# Altium PCB CMV.PcbDoc (part 1 of 2)
Units mm, origin at the board's own origin, x right, y up, seen from the top; angles counter-clockwise.
Board outline 97.43 x 161.7 mm, 4 copper layers (LVDS, GND, POWER, CMOS), stack 0.735 mm thick; 59 components, 58 nets, 1207 pads, 70 vias.
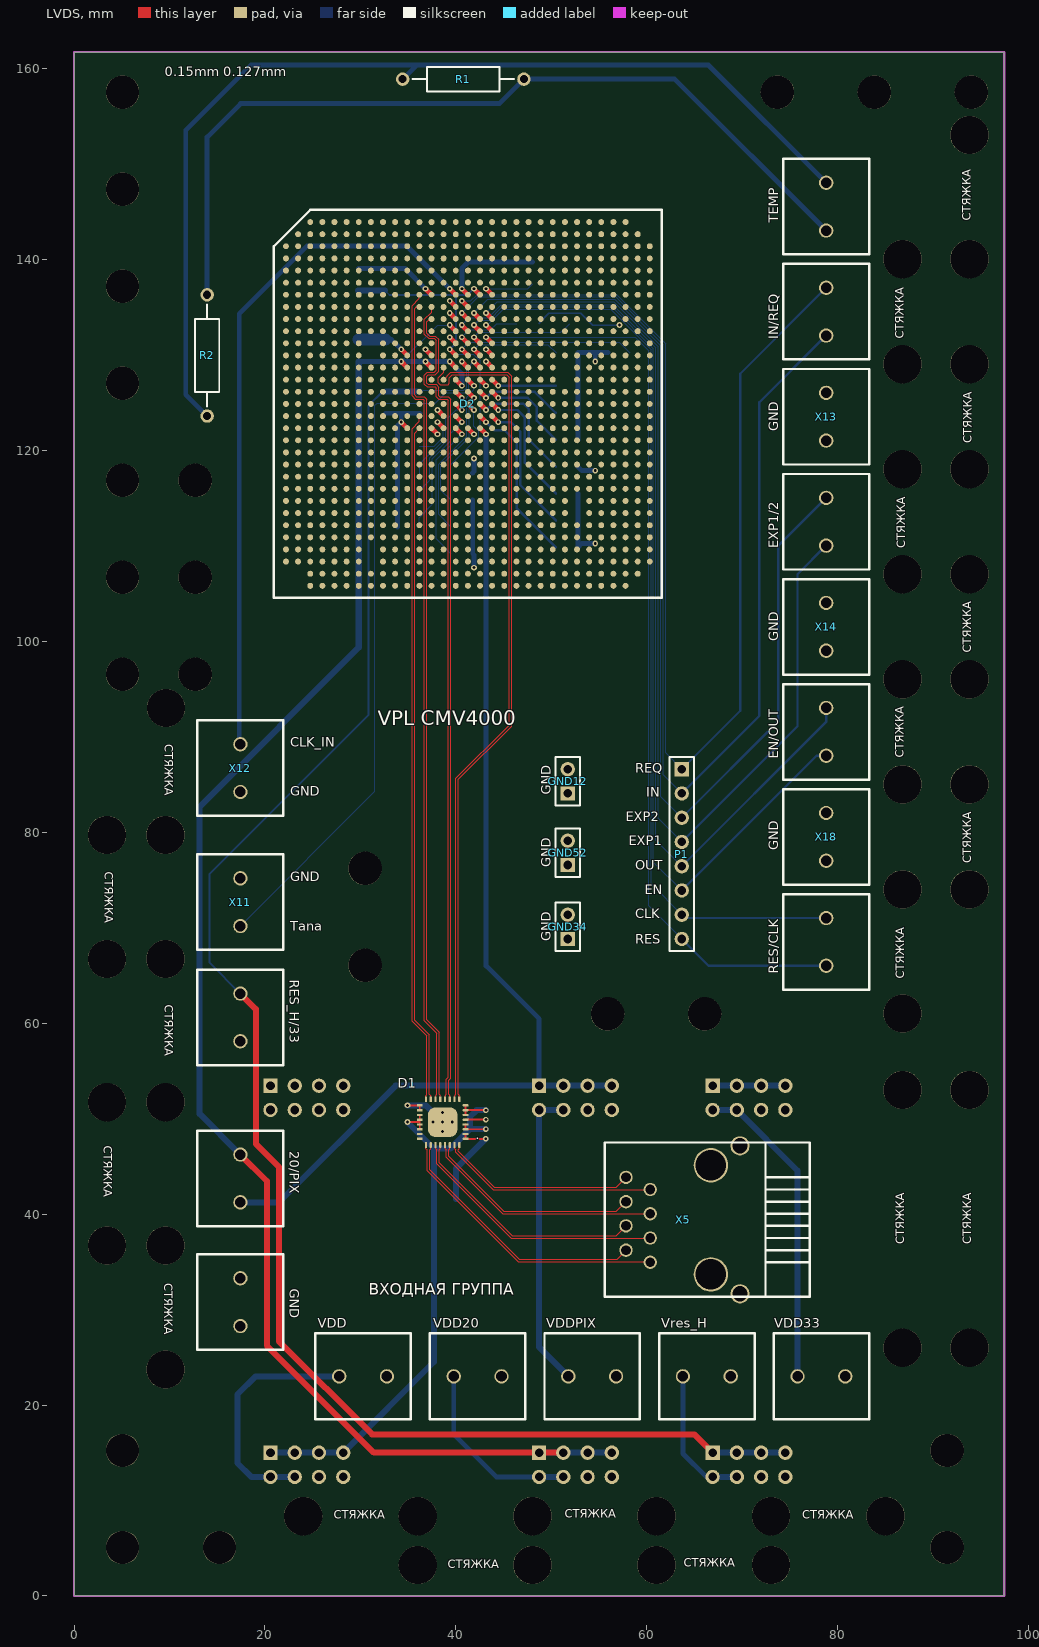
[diagram p0: LVDS view]
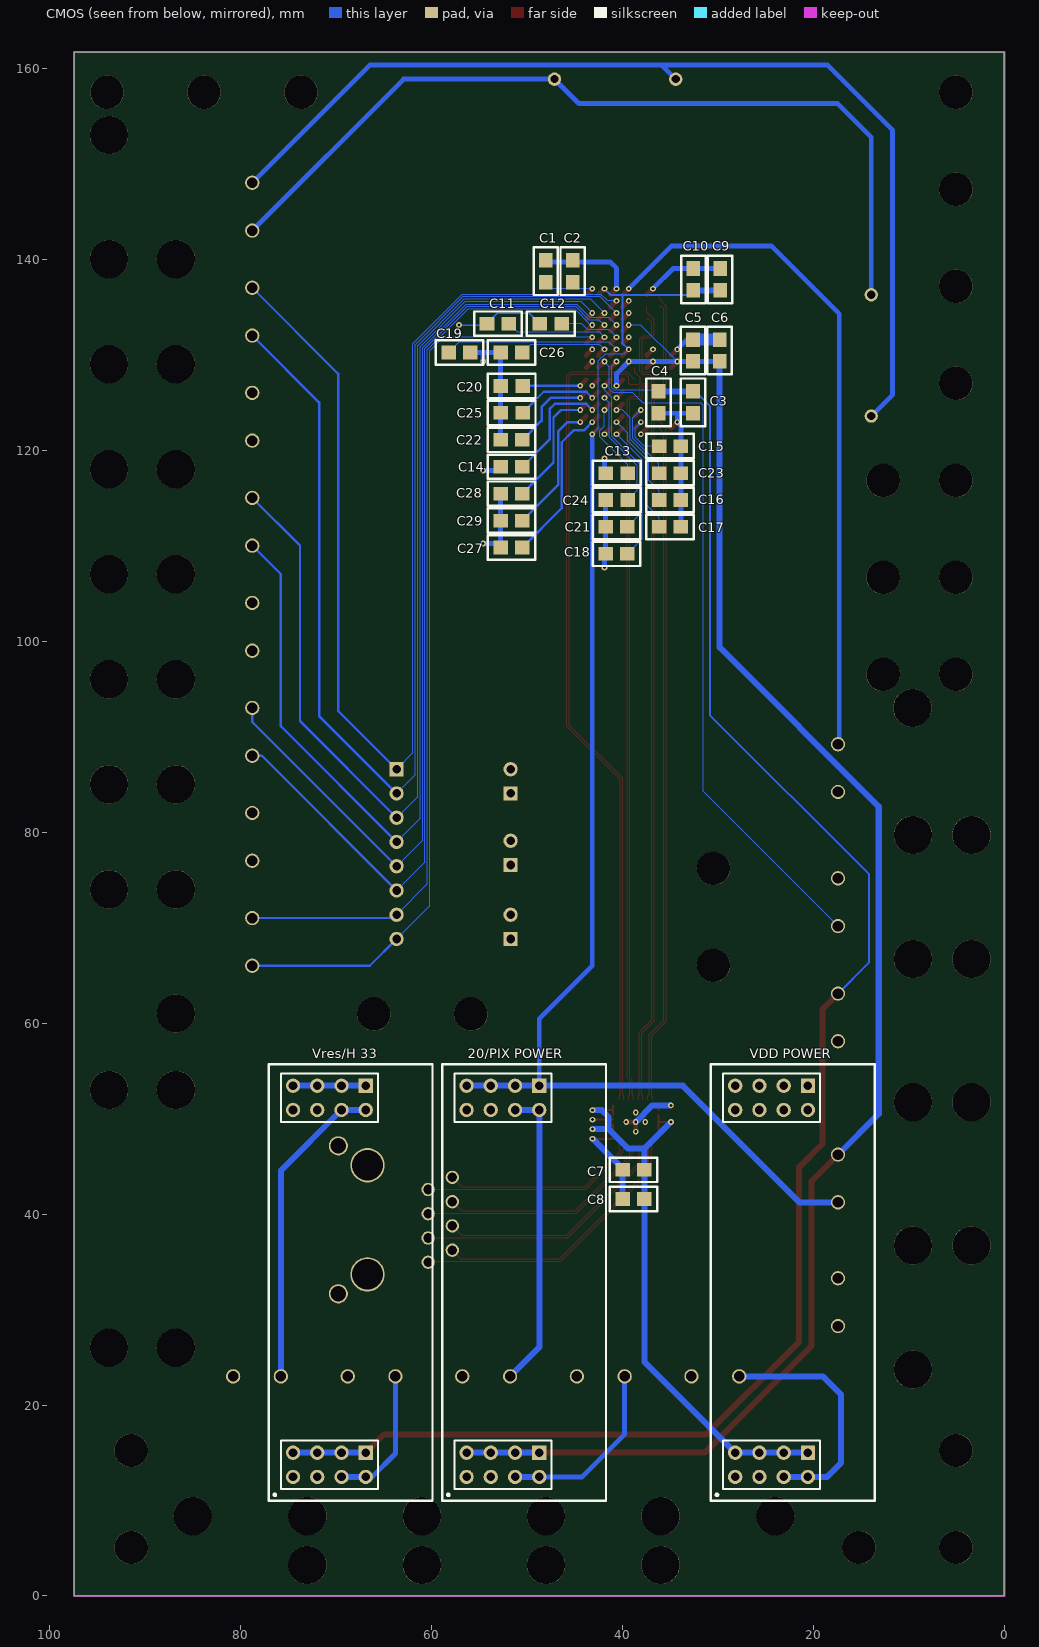
[diagram p1: CMOS view, seen from below]
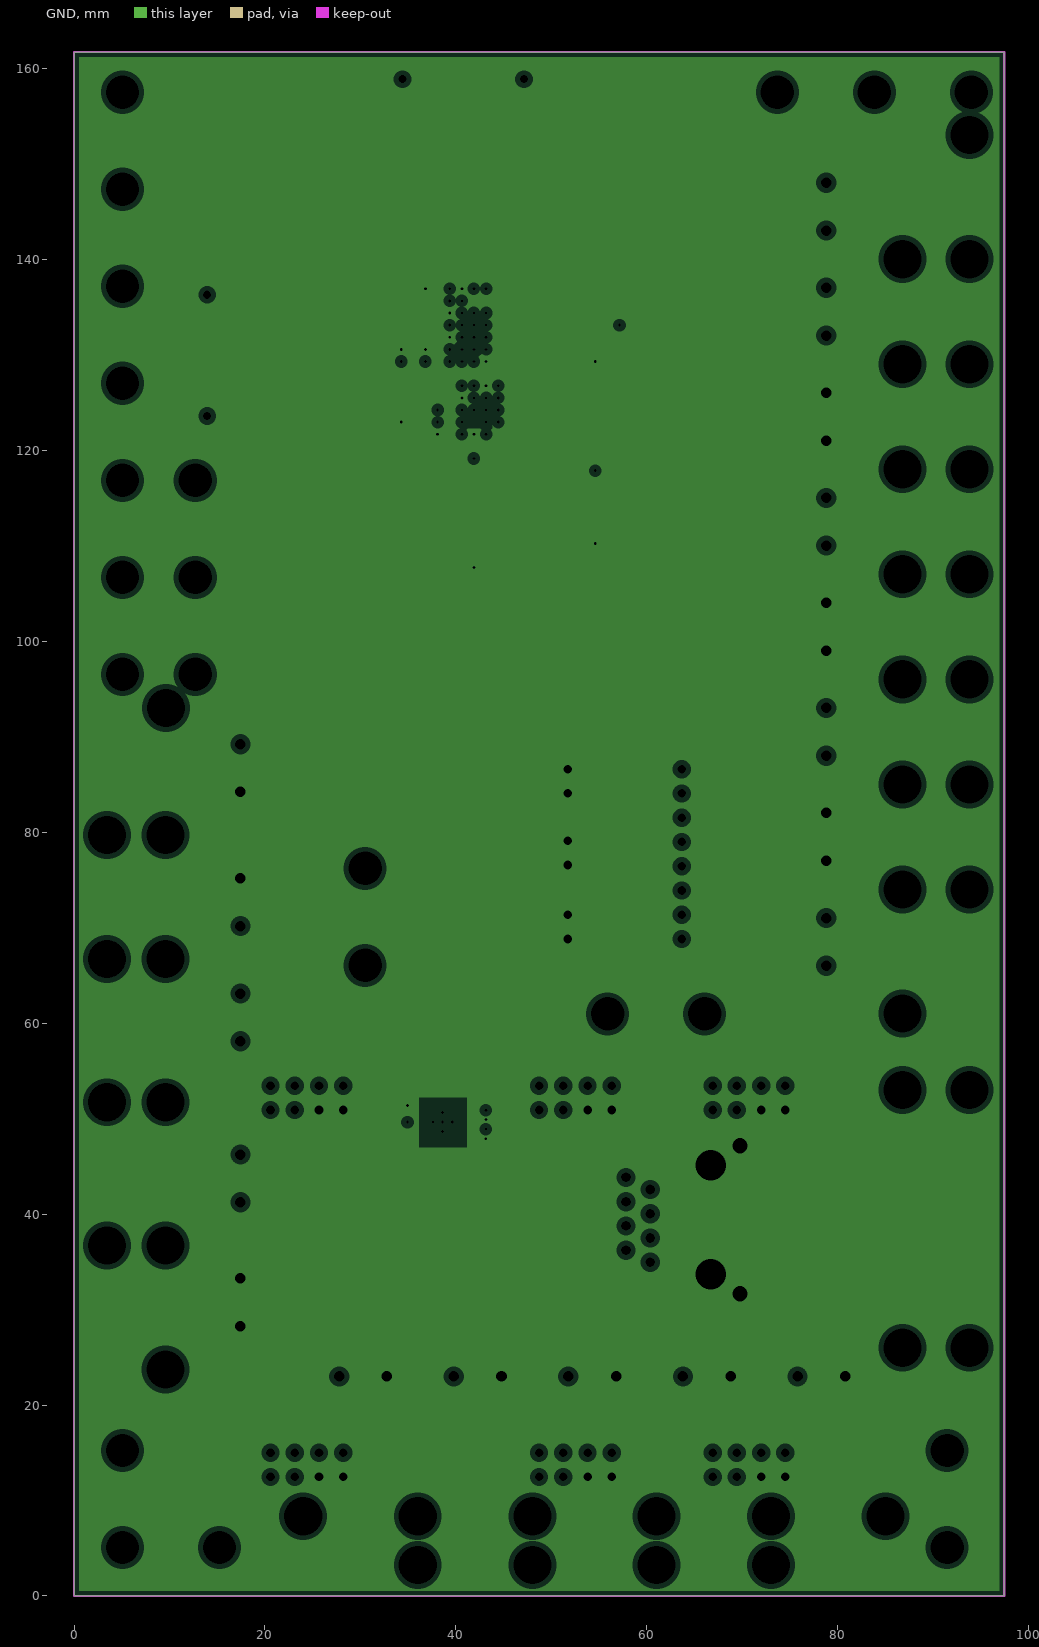
[diagram p2: GND, clearances drawn from the general rule]
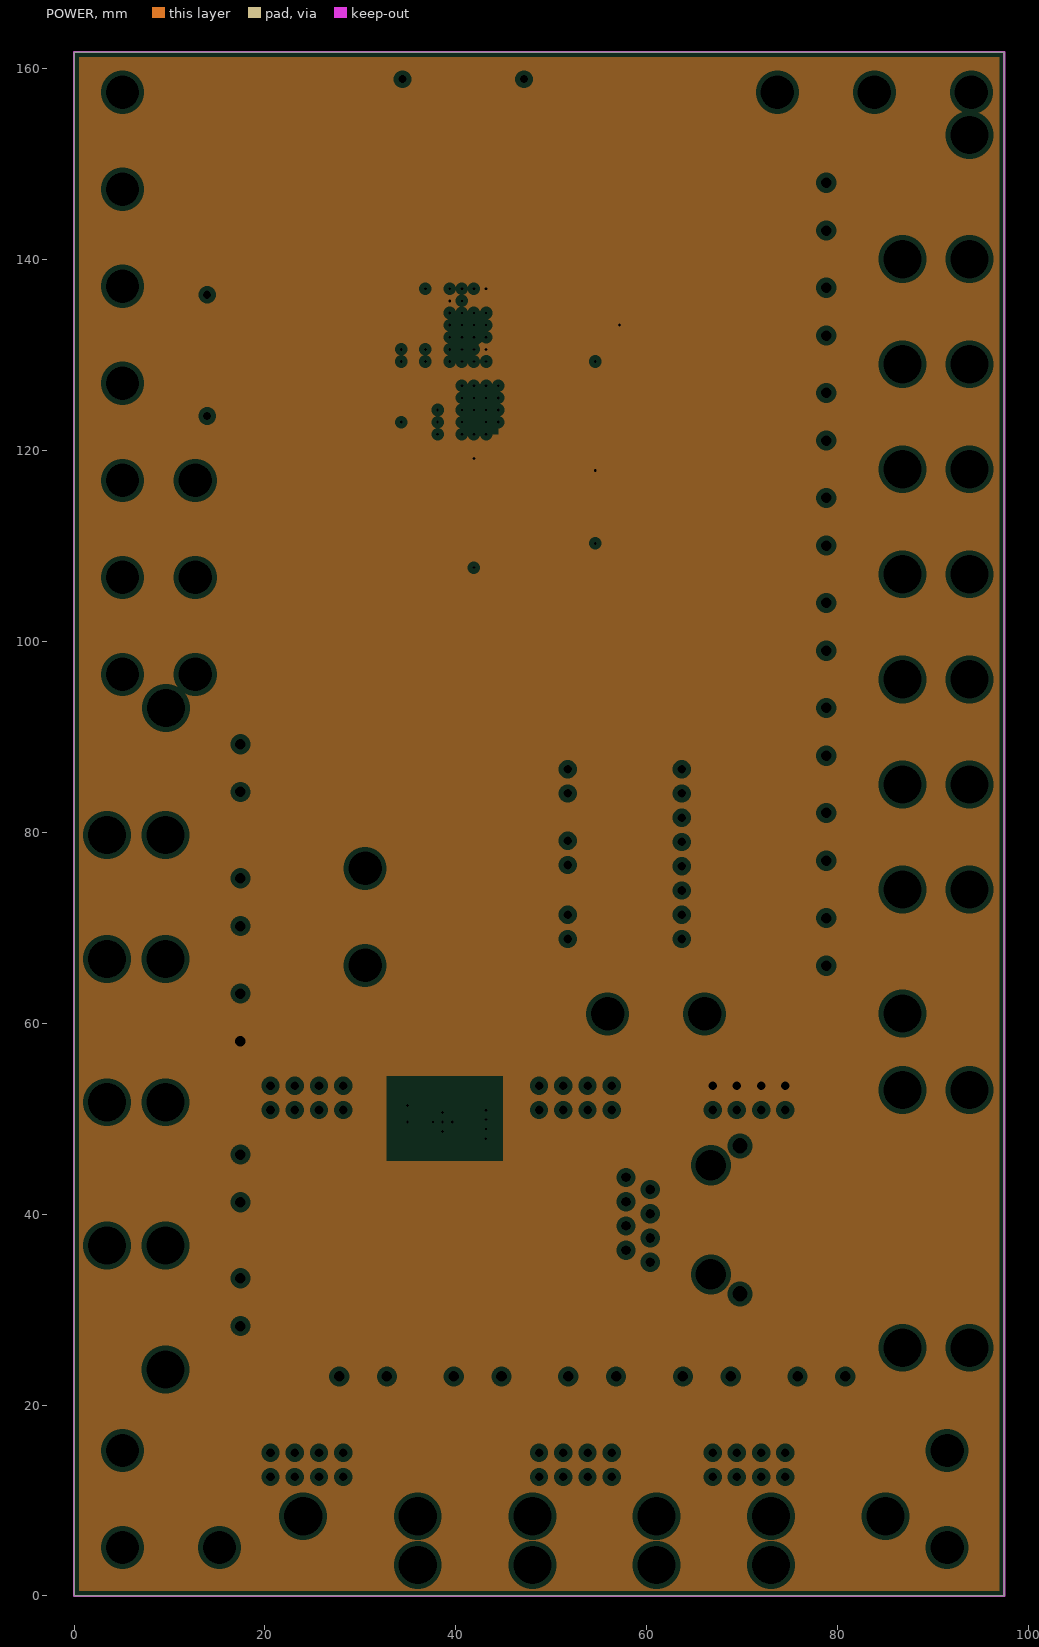
[diagram p3: POWER, clearances drawn from the general rule]

## Layer stack, top to bottom
Top Solder: solder mask 0.0102, Solder Resist, Dk 3.5
LVDS: signal copper 0.018
Dielectric 1: core 0.15, FR-4, Dk 4.6
GND: plane copper 0.018, net GND
Dielectric 2: core 0.15, FR-4, Dk 4.2
POWER: plane copper 0.254, net VDD33
Dielectric 3: prepreg 0.127, Dk 4.2
CMOS: signal copper 0.018
Bottom Solder: solder mask 0.0102, Solder Resist, Dk 3.5

## Board outline
0,0 97.434,0 97.434,161.695 0,161.695

## Design rules (kind name [scope] priority, off if disabled: settings)
Clearance [All] p1: gap=0.127
DiffPairsRouting [All] p1: maxlimit=0.254 minlimit=0.127 mostfreqgap=0.254 toplayer_maxgap=0.127 toplayer_prefgap=0.127 toplayer_minwidth=0.127 toplayer_maxwidth=0.127 toplayer_prefwidth=0.127 bottomlayer_mingap=0.254 bottomlayer_minwidth=0.381 bottomlayer_maxwidth=0.381 bottomlayer_prefwidth=0.381 maxuncoupledlength=12.7
HoleSize [All] p1: absolutevalues=TRUE maxlimit=20.54 minlimit=0.025 maxpercent=80.000 minpercent=20.000
MinimumSolderMaskSliver [All] p1: minsoldermaskwidth=0
PlaneClearance [All] p1: clearance=0.508
PlaneConnect [All] p1: planeconnectstyle=Relief reliefexpansion=0.508 reliefentries=4 reliefconductorwidth=0.254 reliefairgap=0.254
PolygonConnect [All] p1: connectstyle=Relief reliefconductorwidth=0.254 reliefentries=4 polygonreliefangle="90 Angle" airgapwidth=0.254
RoutingVias [All] p1: holewidth=0.3 width=0.6 viastyle="Through Hole" minholewidth=0.3 minwidth=0.6 maxholewidth=0.3 maxwidth=0.6
SolderMaskExpansion [All] p1: expansion=0.1
Width [All] p1: maxlimit=2.254 minlimit=0.125 preferedwidth=0.254 toplayer_prefwidth=0.127 bottomlayer_minwidth=0.127 minimp=50.000000 maximp=50.000000 favimp=50.000000
24 further rules are at their usual default settings.

## Classes and differential pairs
differential pair OUT1REP: +OUT1REP_P -OUT1REP_N
differential pair OUT1: +OUT1_P -OUT1_N
differential pair OUT9REP: +OUT9REP_P -OUT9REP_N
differential pair OUT9: +OUT9_P -OUT9_N
differential pair OUTCLKREP: +OUTCLKREP_P -OUTCLKREP_N
differential pair OUTCLK: +OUTCLK_P -OUTCLK_N
differential pair OUTCTRREP: +OUTCTRREP_P -OUTCTRREP_N
differential pair OUTCTR: +OUTCTR_P -OUTCTR_N

## Components (designator, comment, footprint, x,y, rotation, side; value= is the part's Value field where it differs from the comment)
20/PIX "KL_2" KLEMMNIK_2 17.424,46.227 r270 top (schematic designator X1)
"20/PIX POWER" "MEZ_POWER" MEZON_POWER_NEW 56.325,12.47 r90 bottom (schematic designator X4)
C1 "0,1" CAP_SMALL 49.301,141.248 r270 bottom
C2 "0,01" CAP_SMALL 46.482,141.248 r270 bottom
C3 "0,1" CAP_SMALL 31.344,122.503 r90 bottom
C4 "0,01" CAP_SMALL 34.95,122.503 r90 bottom
C5 "0,1" CAP_SMALL 33.884,132.943 r270 bottom
C6 "0,01" CAP_SMALL 31.09,132.943 r270 bottom
C7 "0,1" CAP_SMALL 41.351,43.357 r180 bottom
C8 "0,01" CAP_SMALL 41.351,40.309 r180 bottom
C9 "0,1" CAP_SMALL 31.039,140.385 r270 bottom
C10 "0,01" CAP_SMALL 33.833,140.385 r270 bottom
C11 "0,1" CAP_SMALL 55.55,131.977 r180 bottom
C12 "0,1" CAP_SMALL 50.013,131.977 r180 bottom
C13 "0,1" CAP_SMALL 43.104,116.331 r180 bottom
C14 "0,1" CAP_SMALL 54.127,116.991 r180 bottom
C15 "0,1" CAP_SMALL 32.512,121.69 r0 bottom
C16 "0,1" CAP_SMALL 32.512,116.052 r0 bottom
C17 "0,1" CAP_SMALL 32.512,113.232 r0 bottom
C18 "0,1" CAP_SMALL 43.129,107.873 r180 bottom
C19 "0,1" CAP_SMALL 54.559,131.495 r0 bottom
C20 "0,1" CAP_SMALL 54.102,125.45 r180 bottom
C21 "0,1" CAP_SMALL 43.129,110.692 r180 bottom
C22 "0,1" CAP_SMALL 54.127,119.811 r180 bottom
C23 "0,1" CAP_SMALL 32.512,118.871 r0 bottom
C24 "0,1" CAP_SMALL 43.104,113.512 r180 bottom
C25 "0,1" CAP_SMALL 54.102,122.63 r180 bottom
C26 "0,1" CAP_SMALL 54.127,128.955 r180 bottom
C27 "0,1" CAP_SMALL 54.127,108.533 r180 bottom
C28 "0,1" CAP_SMALL 54.127,114.172 r180 bottom
C29 "0,1" CAP_SMALL 54.127,111.353 r180 bottom
D1 "DS90LV804TSQ(REP)" DS90LV804TSQ 38.608,49.631 r180 top
D2 "CMV4000" SOCKET_AM2 23.47,142.62 r0 top
EN/OUT "KL_2" KLEMMNIK_2 78.77,88 r90 top (schematic designator X12)
EXP1/2 "KL_2" KLEMMNIK_2 78.77,110 r90 top (schematic designator X11)
GND "KL_2" KLEMMNIK_2 17.424,33.273 r270 top (schematic designator X3)
GND12 "GND" HDR1X2 51.714,84.048 r90 top (schematic designator P2)
GND34 "GND" HDR1X2 51.714,68.808 r90 top (schematic designator P4)
GND52 "GND" HDR1X2 51.714,76.555 r90 top (schematic designator P3)
IN/REQ "KL_2" KLEMMNIK_2 78.77,132 r90 top (schematic designator X14)
P1 "Header 8" HDR1X8 63.652,86.588 r270 top
R1 "Res Semi" AXIAL-0.5 40.767,158.851 r0 top
R2 "Res Semi" AXIAL-0.5 13.945,129.92 r90 top
RES/CLK "KL_2" KLEMMNIK_2 78.77,66 r90 top (schematic designator X13)
RES_H/33 "KL_2" KLEMMNIK_2 17.424,63.093 r270 top (schematic designator X2)
TEMP "KL_2" KLEMMNIK_2 78.77,148 r270 top (schematic designator X6)
VDD "KL_2" KLEMMNIK_2 27.77,23 r0 top (schematic designator X17)
VDD20 "KL_2" KLEMMNIK_2 39.77,23 r0 top (schematic designator X7)
VDD33 "KL_2" KLEMMNIK_2 75.77,23 r0 top (schematic designator X15)
"VDD POWER" "MEZ_POWER" MEZON_POWER_NEW 28.194,12.47 r90 bottom (schematic designator X16)
VDDPIX "KL_2" KLEMMNIK_2 51.77,23 r0 top (schematic designator X8)
"Vres/H 33" "MEZ_POWER" MEZON_POWER_NEW 74.498,12.47 r90 bottom (schematic designator X9)
Vres_H "KL_2" KLEMMNIK_2 63.77,23 r0 top (schematic designator X10)
X5 "RJ45" RJ45 60.35,34.949 r90 top
X11 "Tana" KLEMMNIK_2 17.424,75.158 r270 top
X12 "CLK_IN" KLEMMNIK_2 17.424,84.2 r90 top
X13 "GND" KLEMMNIK_2 78.77,121 r90 top
X14 "GND" KLEMMNIK_2 78.77,99 r90 top
X18 "GND" KLEMMNIK_2 78.77,77 r90 top

## Footprints (in the part's own frame and the unit in brackets; to place one, negate y for a bottom-side part, rotate by r counter-clockwise, add the part's x,y. Pads: shape width x height; smd on the part's side, far side on the other; paste and mask are expansions set on the pad)
AXIAL-0.5 [mm] "Axial Device, Thru-Hole; 2 Leads; 0.5 in Pin Spacing"
  round 1.4 hole 0.85: 1(-6.35,0) 2(6.35,0)
  silkscreen extent -5.33,-1.27 5.33,1.27
CAP_SMALL [mil] "FROM_MAX"
  rect 60x55.98 smd: 1(53.71,50) 2(143.71,50)
  silkscreen extent 1,0 197,100, body extent 20,18 178,82, height 100
DS90LV804TSQ [mm]
  rrect50% 0.6x0.24 smd: 1(-2.4,1.75) 2(-2.4,1.25) 3(-2.4,0.75) 4(-2.4,0.25) 5(-2.4,-0.25) 6(-2.4,-0.75) 7(-2.4,-1.25) 8(-2.4,-1.75) 17(2.4,-1.75) 18(2.4,-1.25) 19(2.4,-0.75) 20(2.4,-0.25) 21(2.4,0.25) 22(2.4,0.75) 23(2.4,1.25) 24(2.4,1.75)
  rrect50% 0.24x0.6 smd: 9(-1.75,-2.4) 10(-1.25,-2.4) 11(-0.75,-2.4) 12(-0.25,-2.4) 13(0.25,-2.4) 14(0.75,-2.4) 15(1.25,-2.4) 16(1.75,-2.4) 25(1.75,2.4) 26(1.25,2.4) 27(0.75,2.4) 28(0.25,2.4) 29(-0.25,2.4) 30(-0.75,2.4) 31(-1.25,2.4) 32(-1.75,2.4)
  rrect50% 3.1x3.1 smd: 33(0,0)
HDR1X2 [mm] "Connector; Header; 2 Position"
  rect 1.5x1.5 hole 0.9: 1(0,0)
  round 1.5 hole 0.9: 2(2.54,0)
  silkscreen extent -1.27,-1.27 3.81,1.27
HDR1X8 [mm] "Connector; Header; 8 Position"
  rect 1.5x1.5 hole 0.9: 1(0,0)
  round 1.5 hole 0.9: 2(2.54,0) 3(5.08,0) 4(7.62,0) 5(10.16,0) 6(12.7,0) 7(15.24,0) 8(17.78,0)
  silkscreen extent -1.27,-1.27 19.05,1.27
KLEMMNIK_2 [mm]
  round 1.5 hole 1.1: 1(0,0) 2(5,0)
  silkscreen extent -2.5,-4.5 7.5,4.5
MEZON_POWER_NEW [mm]
  round 1.5 hole 0.9: 1(0,-2.54) 1(0,0) 2(0,-7.62) 2(0,-5.08) 3(2.54,-5.08) 3(2.54,-2.54) 3(2.54,0) 4(38.43,-2.54) 4(38.43,0) 5(38.43,-7.62) 5(38.43,-5.08) 6(40.97,-5.08) 6(40.97,-2.54) 6(40.97,0)
  rect 1.5x1.5 hole 0.9: 3(2.54,-7.62) 6(40.97,-7.62)
  silkscreen extent -2.51,-14.61 43.21,2.54
RJ45 [mm]
  round 1.4 hole 1: 1(0,0) 2(1.27,2.54) 3(2.54,0) 4(3.81,2.54) 5(5.08,0) 6(6.35,2.54) 7(7.62,0) 8(8.89,2.54)
  round 3.6 hole 3.2: 9(-1.27,-6.35) 10(10.16,-6.35)
  round 2 hole 1.6: 11(-3.302,-9.398) 12(12.192,-9.398)
  silkscreen extent -3.61,-16.69 12.54,4.76
SOCKET_AM2 [mm]
  round 0.62 smd: A3(1.27,1.27) A4(2.54,1.27) A5(3.81,1.27) A6(5.08,1.27) A7(6.35,1.27) A8(7.62,1.27) A9(8.89,1.27) A10(10.16,1.27) A11(11.43,1.27) A12(12.7,1.27) A13(13.97,1.27) A14(15.24,1.27) A15(16.51,1.27) A16(17.78,1.27) A17(19.05,1.27) A18(20.32,1.27) A19(21.59,1.27) A20(22.86,1.27) A21(24.13,1.27) A22(25.4,1.27) A23(26.67,1.27) A24(27.94,1.27) A25(29.21,1.27) A26(30.48,1.27) A27(31.75,1.27) A28(33.02,1.27) A29(34.29,1.27) AA1(-1.27,-24.13) AA2(0,-24.13) AA3(1.27,-24.13) AA4(2.54,-24.13) AA5(3.81,-24.13) AA6(5.08,-24.13) AA7(6.35,-24.13) AA8(7.62,-24.13) AA9(8.89,-24.13) AA10(10.16,-24.13) AA11(11.43,-24.13) AA12(12.7,-24.13) AA13(13.97,-24.13) AA14(15.24,-24.13) AA15(16.51,-24.13) AA16(17.78,-24.13) AA17(19.05,-24.13) AA18(20.32,-24.13) AA19(21.59,-24.13) AA20(22.86,-24.13) AA21(24.13,-24.13) AA22(25.4,-24.13) AA23(26.67,-24.13) AA24(27.94,-24.13) AA25(29.21,-24.13) AA26(30.48,-24.13) AA27(31.75,-24.13) AA28(33.02,-24.13) AA29(34.29,-24.13) AA30(35.56,-24.13) AA31(36.83,-24.13) AB1(-1.27,-25.4) AB2(0,-25.4) AB3(1.27,-25.4) AB4(2.54,-25.4) AB5(3.81,-25.4) AB6(5.08,-25.4) AB7(6.35,-25.4) AB8(7.62,-25.4) AB9(8.89,-25.4) AB10(10.16,-25.4) AB11(11.43,-25.4) AB12(12.7,-25.4) AB13(13.97,-25.4) AB14(15.24,-25.4) AB15(16.51,-25.4) AB16(17.78,-25.4) AB17(19.05,-25.4) AB18(20.32,-25.4) AB19(21.59,-25.4) AB20(22.86,-25.4) AB21(24.13,-25.4) AB22(25.4,-25.4) AB23(26.67,-25.4) AB24(27.94,-25.4) AB25(29.21,-25.4) AB26(30.48,-25.4) AB27(31.75,-25.4) AB28(33.02,-25.4) AB29(34.29,-25.4) AB30(35.56,-25.4) AB31(36.83,-25.4) AC1(-1.27,-26.67) AC2(0,-26.67) AC3(1.27,-26.67) AC4(2.54,-26.67) AC5(3.81,-26.67) AC6(5.08,-26.67) AC7(6.35,-26.67) AC8(7.62,-26.67) AC9(8.89,-26.67) AC10(10.16,-26.67) AC11(11.43,-26.67) AC12(12.7,-26.67) AC13(13.97,-26.67) AC14(15.24,-26.67) AC15(16.51,-26.67) AC16(17.78,-26.67) AC17(19.05,-26.67) AC18(20.32,-26.67) AC19(21.59,-26.67) AC20(22.86,-26.67) AC21(24.13,-26.67) AC22(25.4,-26.67) AC23(26.67,-26.67) AC24(27.94,-26.67) AC25(29.21,-26.67) AC26(30.48,-26.67) AC27(31.75,-26.67) AC28(33.02,-26.67) AC29(34.29,-26.67) AC30(35.56,-26.67) AC31(36.83,-26.67) AD1(-1.27,-27.94) AD2(0,-27.94) AD3(1.27,-27.94) AD4(2.54,-27.94) AD5(3.81,-27.94) AD6(5.08,-27.94) AD7(6.35,-27.94) AD8(7.62,-27.94) AD9(8.89,-27.94) AD10(10.16,-27.94) AD11(11.43,-27.94) AD12(12.7,-27.94) AD13(13.97,-27.94) AD14(15.24,-27.94) AD15(16.51,-27.94) AD16(17.78,-27.94) AD17(19.05,-27.94) AD18(20.32,-27.94) AD19(21.59,-27.94) AD20(22.86,-27.94) AD21(24.13,-27.94) AD22(25.4,-27.94) AD23(26.67,-27.94) AD24(27.94,-27.94) AD26(30.48,-27.94) AD27(31.75,-27.94) AD28(33.02,-27.94) AD29(34.29,-27.94) AD30(35.56,-27.94) AD31(36.83,-27.94) AE1(-1.27,-29.21) AE2(0,-29.21) AE3(1.27,-29.21) AE4(2.54,-29.21) AE5(3.81,-29.21) AE6(5.08,-29.21) AE7(6.35,-29.21) AE8(7.62,-29.21) AE9(8.89,-29.21) AE10(10.16,-29.21) AE11(11.43,-29.21) AE12(12.7,-29.21) AE13(13.97,-29.21) AE14(15.24,-29.21) AE15(16.51,-29.21) AE16(17.78,-29.21) AE17(19.05,-29.21) AE18(20.32,-29.21) AE19(21.59,-29.21) AE20(22.86,-29.21) AE21(24.13,-29.21) AE22(25.4,-29.21) AE23(26.67,-29.21) AE24(27.94,-29.21) AE26(30.48,-29.21) AE27(31.75,-29.21) AE28(33.02,-29.21) AE29(34.29,-29.21) AE30(35.56,-29.21) AE31(36.83,-29.21) AF1(-1.27,-30.48) AF2(0,-30.48) AF3(1.27,-30.48) AF4(2.54,-30.48) AF5(3.81,-30.48) AF6(5.08,-30.48) AF7(6.35,-30.48) AF8(7.62,-30.48) AF9(8.89,-30.48) AF10(10.16,-30.48) AF11(11.43,-30.48) AF12(12.7,-30.48) AF13(13.97,-30.48) AF14(15.24,-30.48) AF15(16.51,-30.48) AF16(17.78,-30.48) AF17(19.05,-30.48) AF18(20.32,-30.48) AF19(21.59,-30.48) AF20(22.86,-30.48) AF21(24.13,-30.48) AF22(25.4,-30.48) AF23(26.67,-30.48) AF24(27.94,-30.48) AF25(29.21,-30.48) AF26(30.48,-30.48) AF27(31.75,-30.48) AF28(33.02,-30.48) AF29(34.29,-30.48) AF30(35.56,-30.48) AF31(36.83,-30.48) AG1(-1.27,-31.75) AG2(0,-31.75) AG3(1.27,-31.75) AG4(2.54,-31.75) AG5(3.81,-31.75) AG6(5.08,-31.75) AG7(6.35,-31.75) AG8(7.62,-31.75) AG9(8.89,-31.75) AG10(10.16,-31.75) AG11(11.43,-31.75) AG12(12.7,-31.75) AG13(13.97,-31.75) AG14(15.24,-31.75) AG15(16.51,-31.75) AG16(17.78,-31.75) AG17(19.05,-31.75) AG18(20.32,-31.75) AG19(21.59,-31.75) AG20(22.86,-31.75) AG21(24.13,-31.75) AG22(25.4,-31.75) AG23(26.67,-31.75) AG24(27.94,-31.75) AG25(29.21,-31.75) AG26(30.48,-31.75) AG27(31.75,-31.75) AG28(33.02,-31.75) AG29(34.29,-31.75) AG30(35.56,-31.75) AG31(36.83,-31.75) AH1(-1.27,-33.02) AH2(0,-33.02) AH3(1.27,-33.02) AH4(2.54,-33.02) AH5(3.81,-33.02) AH6(5.08,-33.02) AH7(6.35,-33.02) AH9(8.89,-33.02) AH10(10.16,-33.02) AH11(11.43,-33.02) AH12(12.7,-33.02) AH13(13.97,-33.02) AH14(15.24,-33.02) AH15(16.51,-33.02) AH16(17.78,-33.02) AH17(19.05,-33.02) AH18(20.32,-33.02) AH19(21.59,-33.02) AH20(22.86,-33.02) AH21(24.13,-33.02) AH22(25.4,-33.02) AH23(26.67,-33.02) AH24(27.94,-33.02) AH25(29.21,-33.02) AH26(30.48,-33.02) AH27(31.75,-33.02) AH28(33.02,-33.02) AH29(34.29,-33.02) AH30(35.56,-33.02) AH31(36.83,-33.02) AJ1(-1.27,-34.29) AJ2(0,-34.29) AJ3(1.27,-34.29) AJ4(2.54,-34.29) AJ5(3.81,-34.29) AJ6(5.08,-34.29) AJ7(6.35,-34.29) AJ9(8.89,-34.29) AJ10(10.16,-34.29) AJ11(11.43,-34.29) AJ12(12.7,-34.29) AJ13(13.97,-34.29) AJ14(15.24,-34.29) AJ15(16.51,-34.29) AJ16(17.78,-34.29) AJ17(19.05,-34.29) AJ18(20.32,-34.29) AJ19(21.59,-34.29) AJ20(22.86,-34.29) AJ21(24.13,-34.29) AJ22(25.4,-34.29) AJ23(26.67,-34.29) AJ24(27.94,-34.29) AJ25(29.21,-34.29) AJ26(30.48,-34.29) AJ27(31.75,-34.29) AJ28(33.02,-34.29) AJ29(34.29,-34.29) AJ30(35.56,-34.29) AJ31(36.83,-34.29) AK3(1.27,-35.56) AK4(2.54,-35.56) AK5(3.81,-35.56) AK6(5.08,-35.56) AK7(6.35,-35.56) AK8(7.62,-35.56) AK9(8.89,-35.56) AK10(10.16,-35.56) AK11(11.43,-35.56) AK12(12.7,-35.56) AK13(13.97,-35.56) AK14(15.24,-35.56) AK15(16.51,-35.56) AK16(17.78,-35.56) AK17(19.05,-35.56) AK18(20.32,-35.56) AK19(21.59,-35.56) AK20(22.86,-35.56) AK21(24.13,-35.56) AK22(25.4,-35.56) AK23(26.67,-35.56) AK24(27.94,-35.56) AK25(29.21,-35.56) AK26(30.48,-35.56) AK27(31.75,-35.56) AK28(33.02,-35.56) AK29(34.29,-35.56) AK30(35.56,-35.56) AL3(1.27,-36.83) AL4(2.54,-36.83) AL5(3.81,-36.83) AL6(5.08,-36.83) AL7(6.35,-36.83) AL8(7.62,-36.83) AL9(8.89,-36.83) AL10(10.16,-36.83) AL11(11.43,-36.83) AL12(12.7,-36.83) AL13(13.97,-36.83) AL14(15.24,-36.83) AL15(16.51,-36.83) AL16(17.78,-36.83) AL17(19.05,-36.83) AL18(20.32,-36.83) AL19(21.59,-36.83) AL20(22.86,-36.83) AL21(24.13,-36.83) AL22(25.4,-36.83) AL23(26.67,-36.83) AL24(27.94,-36.83) AL25(29.21,-36.83) AL26(30.48,-36.83) AL27(31.75,-36.83) AL28(33.02,-36.83) AL29(34.29,-36.83) B2(0,0) B3(1.27,0) B4(2.54,0) B5(3.81,0) B6(5.08,0) B7(6.35,0) B8(7.62,0) B9(8.89,0) B10(10.16,0) B11(11.43,0) B12(12.7,0) B13(13.97,0) B14(15.24,0) B15(16.51,0) B16(17.78,0) B17(19.05,0) B18(20.32,0) B19(21.59,0) B20(22.86,0) B21(24.13,0) B22(25.4,0) B23(26.67,0) B24(27.94,0) B25(29.21,0) B26(30.48,0) B27(31.75,0) B28(33.02,0) B29(34.29,0) B30(35.56,0) C1(-1.27,-1.27) C2(0,-1.27) C3(1.27,-1.27) C4(2.54,-1.27) C5(3.81,-1.27) C6(5.08,-1.27) C7(6.35,-1.27) C8(7.62,-1.27) C9(8.89,-1.27) C10(10.16,-1.27) C11(11.43,-1.27) C12(12.7,-1.27) C13(13.97,-1.27) C14(15.24,-1.27) C15(16.51,-1.27) C16(17.78,-1.27) C17(19.05,-1.27) C18(20.32,-1.27) C19(21.59,-1.27) C20(22.86,-1.27) C21(24.13,-1.27) C22(25.4,-1.27) C23(26.67,-1.27) C24(27.94,-1.27) C25(29.21,-1.27) C26(30.48,-1.27) C27(31.75,-1.27) C28(33.02,-1.27) C29(34.29,-1.27) C30(35.56,-1.27) C31(36.83,-1.27) D1(-1.27,-2.54) D2(0,-2.54) D3(1.27,-2.54) D4(2.54,-2.54) D5(3.81,-2.54) D6(5.08,-2.54) D7(6.35,-2.54) D8(7.62,-2.54) D9(8.89,-2.54) D10(10.16,-2.54) D11(11.43,-2.54) D12(12.7,-2.54) D13(13.97,-2.54) D14(15.24,-2.54) D15(16.51,-2.54) D16(17.78,-2.54) D17(19.05,-2.54) D18(20.32,-2.54) D19(21.59,-2.54) D20(22.86,-2.54) D21(24.13,-2.54) D22(25.4,-2.54) D23(26.67,-2.54) D24(27.94,-2.54) D25(29.21,-2.54) D26(30.48,-2.54) D27(31.75,-2.54) D28(33.02,-2.54) D29(34.29,-2.54) D30(35.56,-2.54) D31(36.83,-2.54) E1(-1.27,-3.81) E2(0,-3.81) E3(1.27,-3.81) E4(2.54,-3.81) E5(3.81,-3.81) E6(5.08,-3.81) E7(6.35,-3.81) E8(7.62,-3.81) E9(8.89,-3.81) E10(10.16,-3.81) E11(11.43,-3.81) E12(12.7,-3.81) E13(13.97,-3.81) E14(15.24,-3.81) E15(16.51,-3.81) E16(17.78,-3.81) E17(19.05,-3.81) E18(20.32,-3.81) E19(21.59,-3.81) E20(22.86,-3.81) E21(24.13,-3.81) E22(25.4,-3.81) E23(26.67,-3.81) E24(27.94,-3.81) E25(29.21,-3.81) E26(30.48,-3.81) E27(31.75,-3.81) E28(33.02,-3.81) E29(34.29,-3.81) E30(35.56,-3.81) E31(36.83,-3.81) F1(-1.27,-5.08) F2(0,-5.08) F3(1.27,-5.08) F4(2.54,-5.08) F5(3.81,-5.08) F6(5.08,-5.08) F7(6.35,-5.08) F8(7.62,-5.08) F9(8.89,-5.08) F10(10.16,-5.08) F11(11.43,-5.08) F12(12.7,-5.08) F13(13.97,-5.08) F14(15.24,-5.08) F15(16.51,-5.08) F16(17.78,-5.08) F17(19.05,-5.08) F18(20.32,-5.08) F19(21.59,-5.08) F20(22.86,-5.08) F21(24.13,-5.08) F22(25.4,-5.08) F23(26.67,-5.08) F24(27.94,-5.08) F25(29.21,-5.08) F26(30.48,-5.08) F27(31.75,-5.08) F28(33.02,-5.08) F29(34.29,-5.08) F30(35.56,-5.08) F31(36.83,-5.08) G1(-1.27,-6.35) G2(0,-6.35) G3(1.27,-6.35) G4(2.54,-6.35) G5(3.81,-6.35) G6(5.08,-6.35) G7(6.35,-6.35) G8(7.62,-6.35) G9(8.89,-6.35) G10(10.16,-6.35) G11(11.43,-6.35) G12(12.7,-6.35) G13(13.97,-6.35) G14(15.24,-6.35) G15(16.51,-6.35) G16(17.78,-6.35) G17(19.05,-6.35) G18(20.32,-6.35) G19(21.59,-6.35) G20(22.86,-6.35) G21(24.13,-6.35) G22(25.4,-6.35) G23(26.67,-6.35) G24(27.94,-6.35) G25(29.21,-6.35) G26(30.48,-6.35) G27(31.75,-6.35) G28(33.02,-6.35) G29(34.29,-6.35) G30(35.56,-6.35) G31(36.83,-6.35) H1(-1.27,-7.62) H2(0,-7.62) H3(1.27,-7.62) H4(2.54,-7.62) H5(3.81,-7.62) H6(5.08,-7.62) H7(6.35,-7.62) H8(7.62,-7.62) H9(8.89,-7.62) H10(10.16,-7.62) H11(11.43,-7.62) H12(12.7,-7.62) H13(13.97,-7.62) H14(15.24,-7.62) H15(16.51,-7.62) H16(17.78,-7.62) H17(19.05,-7.62) H18(20.32,-7.62) H19(21.59,-7.62) H20(22.86,-7.62) H21(24.13,-7.62) H22(25.4,-7.62) H23(26.67,-7.62) H24(27.94,-7.62) H25(29.21,-7.62) H26(30.48,-7.62) H27(31.75,-7.62) H28(33.02,-7.62) H29(34.29,-7.62) H30(35.56,-7.62) H31(36.83,-7.62) J1(-1.27,-8.89) J2(0,-8.89) J3(1.27,-8.89) J4(2.54,-8.89) J5(3.81,-8.89) J6(5.08,-8.89) J7(6.35,-8.89) J8(7.62,-8.89) J9(8.89,-8.89) J10(10.16,-8.89) J11(11.43,-8.89) J12(12.7,-8.89) J13(13.97,-8.89) J14(15.24,-8.89) J15(16.51,-8.89) J16(17.78,-8.89) J17(19.05,-8.89) J18(20.32,-8.89) J19(21.59,-8.89) J20(22.86,-8.89) J21(24.13,-8.89) J22(25.4,-8.89) J23(26.67,-8.89) J24(27.94,-8.89) J25(29.21,-8.89) J26(30.48,-8.89) J27(31.75,-8.89) J28(33.02,-8.89) J29(34.29,-8.89) J30(35.56,-8.89) J31(36.83,-8.89) K1(-1.27,-10.16) K2(0,-10.16) K3(1.27,-10.16) K4(2.54,-10.16) K5(3.81,-10.16) K6(5.08,-10.16) K7(6.35,-10.16) K8(7.62,-10.16) K9(8.89,-10.16) K10(10.16,-10.16) K11(11.43,-10.16) K12(12.7,-10.16) K13(13.97,-10.16) K14(15.24,-10.16) K15(16.51,-10.16) K16(17.78,-10.16) K17(19.05,-10.16) K18(20.32,-10.16) K19(21.59,-10.16) K20(22.86,-10.16) K21(24.13,-10.16) K22(25.4,-10.16) K23(26.67,-10.16) K24(27.94,-10.16) K25(29.21,-10.16) K26(30.48,-10.16) K27(31.75,-10.16) K28(33.02,-10.16) K29(34.29,-10.16) K30(35.56,-10.16) K31(36.83,-10.16) L1(-1.27,-11.43) L2(0,-11.43) L3(1.27,-11.43) L4(2.54,-11.43) L5(3.81,-11.43) L6(5.08,-11.43) L7(6.35,-11.43) L9(8.89,-11.43) L10(10.16,-11.43) L11(11.43,-11.43) L12(12.7,-11.43) L13(13.97,-11.43) L14(15.24,-11.43) L15(16.51,-11.43) L16(17.78,-11.43) L17(19.05,-11.43) L18(20.32,-11.43) L19(21.59,-11.43) L20(22.86,-11.43) L21(24.13,-11.43) L22(25.4,-11.43) L23(26.67,-11.43) L24(27.94,-11.43) L25(29.21,-11.43) L26(30.48,-11.43) L27(31.75,-11.43) L28(33.02,-11.43) L29(34.29,-11.43) L30(35.56,-11.43) L31(36.83,-11.43) M1(-1.27,-12.7) M2(0,-12.7) M3(1.27,-12.7) M4(2.54,-12.7) M5(3.81,-12.7) M6(5.08,-12.7) M7(6.35,-12.7) M9(8.89,-12.7) M10(10.16,-12.7) M11(11.43,-12.7) M12(12.7,-12.7) M13(13.97,-12.7) M14(15.24,-12.7) M15(16.51,-12.7) M16(17.78,-12.7) M17(19.05,-12.7) M18(20.32,-12.7) M19(21.59,-12.7) M20(22.86,-12.7) M21(24.13,-12.7) M22(25.4,-12.7) M23(26.67,-12.7) M24(27.94,-12.7) M25(29.21,-12.7) M26(30.48,-12.7) M27(31.75,-12.7) M28(33.02,-12.7) M29(34.29,-12.7) M30(35.56,-12.7) M31(36.83,-12.7) N1(-1.27,-13.97) N2(0,-13.97) N3(1.27,-13.97) N4(2.54,-13.97) N5(3.81,-13.97) N6(5.08,-13.97) N7(6.35,-13.97) N8(7.62,-13.97) N9(8.89,-13.97) N10(10.16,-13.97) N11(11.43,-13.97) N12(12.7,-13.97) N13(13.97,-13.97) N14(15.24,-13.97) N15(16.51,-13.97) N16(17.78,-13.97) N17(19.05,-13.97) N18(20.32,-13.97) N19(21.59,-13.97) N20(22.86,-13.97) N21(24.13,-13.97) N22(25.4,-13.97) N23(26.67,-13.97) N25(29.21,-13.97) N26(30.48,-13.97) N27(31.75,-13.97) N28(33.02,-13.97) N29(34.29,-13.97) N30(35.56,-13.97) N31(36.83,-13.97) P1(-1.27,-15.24) P2(0,-15.24) P3(1.27,-15.24) P4(2.54,-15.24) P5(3.81,-15.24) P6(5.08,-15.24) P7(6.35,-15.24) P8(7.62,-15.24) P9(8.89,-15.24) P10(10.16,-15.24) P11(11.43,-15.24) P12(12.7,-15.24) P13(13.97,-15.24) P14(15.24,-15.24) P15(16.51,-15.24) P16(17.78,-15.24) P17(19.05,-15.24) P18(20.32,-15.24) P19(21.59,-15.24) P20(22.86,-15.24) P21(24.13,-15.24) P22(25.4,-15.24) P23(26.67,-15.24) P25(29.21,-15.24) P26(30.48,-15.24) P27(31.75,-15.24) P28(33.02,-15.24) P29(34.29,-15.24) P30(35.56,-15.24) P31(36.83,-15.24) R1(-1.27,-16.51) R2(0,-16.51) R3(1.27,-16.51) R4(2.54,-16.51) R5(3.81,-16.51) R6(5.08,-16.51) R7(6.35,-16.51) R8(7.62,-16.51) R9(8.89,-16.51) R10(10.16,-16.51) R11(11.43,-16.51) R12(12.7,-16.51) R13(13.97,-16.51) R14(15.24,-16.51) R15(16.51,-16.51) R16(17.78,-16.51) R17(19.05,-16.51) R18(20.32,-16.51) R19(21.59,-16.51) R20(22.86,-16.51) R21(24.13,-16.51) R22(25.4,-16.51) R23(26.67,-16.51) R24(27.94,-16.51) R25(29.21,-16.51) R26(30.48,-16.51) R27(31.75,-16.51) R28(33.02,-16.51) R29(34.29,-16.51) R30(35.56,-16.51) R31(36.83,-16.51) T1(-1.27,-17.78) T2(0,-17.78) T3(1.27,-17.78) T4(2.54,-17.78) T5(3.81,-17.78) T6(5.08,-17.78) T7(6.35,-17.78) T8(7.62,-17.78) T9(8.89,-17.78) T10(10.16,-17.78) T11(11.43,-17.78) T12(12.7,-17.78) T13(13.97,-17.78) T14(15.24,-17.78) T15(16.51,-17.78) T16(17.78,-17.78) T17(19.05,-17.78) T18(20.32,-17.78) T19(21.59,-17.78) T20(22.86,-17.78) T21(24.13,-17.78) T22(25.4,-17.78) T23(26.67,-17.78) T24(27.94,-17.78) T25(29.21,-17.78) T26(30.48,-17.78) T27(31.75,-17.78) T28(33.02,-17.78) T29(34.29,-17.78) T30(35.56,-17.78) T31(36.83,-17.78) U1(-1.27,-19.05) U2(0,-19.05) U3(1.27,-19.05) U4(2.54,-19.05) U5(3.81,-19.05) U6(5.08,-19.05) U7(6.35,-19.05) U8(7.62,-19.05) U9(8.89,-19.05) U10(10.16,-19.05) U11(11.43,-19.05) U12(12.7,-19.05) U13(13.97,-19.05) U14(15.24,-19.05) U15(16.51,-19.05) U16(17.78,-19.05) U17(19.05,-19.05) U18(20.32,-19.05) U19(21.59,-19.05) U20(22.86,-19.05) U21(24.13,-19.05) U22(25.4,-19.05) U23(26.67,-19.05) U24(27.94,-19.05) U25(29.21,-19.05) U26(30.48,-19.05) U27(31.75,-19.05) U28(33.02,-19.05) U29(34.29,-19.05) U30(35.56,-19.05) U31(36.83,-19.05) V1(-1.27,-20.32) V2(0,-20.32) V3(1.27,-20.32) V4(2.54,-20.32) V5(3.81,-20.32) V6(5.08,-20.32) V7(6.35,-20.32) V8(7.62,-20.32) V9(8.89,-20.32) V10(10.16,-20.32) V11(11.43,-20.32) V12(12.7,-20.32) V13(13.97,-20.32) V14(15.24,-20.32) V15(16.51,-20.32) V16(17.78,-20.32) V17(19.05,-20.32) V18(20.32,-20.32) V19(21.59,-20.32) V20(22.86,-20.32) V21(24.13,-20.32) V22(25.4,-20.32) V23(26.67,-20.32) V24(27.94,-20.32) V25(29.21,-20.32) V26(30.48,-20.32) V27(31.75,-20.32) V28(33.02,-20.32) V29(34.29,-20.32) V30(35.56,-20.32) V31(36.83,-20.32) W1(-1.27,-21.59) W2(0,-21.59) W3(1.27,-21.59) W4(2.54,-21.59) W5(3.81,-21.59) W6(5.08,-21.59) W7(6.35,-21.59) W8(7.62,-21.59) W9(8.89,-21.59) W10(10.16,-21.59) W11(11.43,-21.59) W12(12.7,-21.59) W13(13.97,-21.59) W14(15.24,-21.59) W15(16.51,-21.59) W16(17.78,-21.59) W17(19.05,-21.59) W18(20.32,-21.59) W19(21.59,-21.59) W20(22.86,-21.59) W21(24.13,-21.59) W22(25.4,-21.59) W23(26.67,-21.59) W24(27.94,-21.59) W25(29.21,-21.59) W26(30.48,-21.59) W27(31.75,-21.59) W28(33.02,-21.59) W29(34.29,-21.59) W30(35.56,-21.59) W31(36.83,-21.59) Y1(-1.27,-22.86) Y2(0,-22.86) Y3(1.27,-22.86) Y4(2.54,-22.86) Y5(3.81,-22.86) Y6(5.08,-22.86) Y7(6.35,-22.86) Y8(7.62,-22.86) Y9(8.89,-22.86) Y10(10.16,-22.86) Y11(11.43,-22.86) Y12(12.7,-22.86) Y13(13.97,-22.86) Y14(15.24,-22.86) Y15(16.51,-22.86) Y16(17.78,-22.86) Y17(19.05,-22.86) Y18(20.32,-22.86) Y19(21.59,-22.86) Y20(22.86,-22.86) Y21(24.13,-22.86) Y22(25.4,-22.86) Y23(26.67,-22.86) Y24(27.94,-22.86) Y25(29.21,-22.86) Y26(30.48,-22.86) Y27(31.75,-22.86) Y28(33.02,-22.86) Y29(34.29,-22.86) Y30(35.56,-22.86) Y31(36.83,-22.86)
  silkscreen extent -2.54,-38.1 38.1,2.54

## Part data
20/PIX EN/OUT EXP1/2 GND IN/REQ RES/CLK RES_H/33 TEMP VDD VDD20 VDD33 VDDPIX Vres_H X11 X12 X13 X14 X18: library part KLEMMNIK_2
"20/PIX POWER" "VDD POWER" "Vres/H 33": library part MEZON_POWER_NEW
C1 C2 C3 C4 C5 C6 C7 C8 C9 C10 C11 C12 C13 C14 C15 C16 C17 C18 C19 C20 C21 C22 C23 C24 C25 C26 C27 C28 C29: library part CAP_SMALL
D1: library part DS90LV804TSQ
GND12 GND34 GND52: library part "Header 2", "Header, 2-Pin"
P1: "Header, 8-Pin"
R1 R2: "Semiconductor Resistor"

## Free pads (board coordinates)
  round 4 hole 4 mask+0: 0(3.451,36.711) 0(3.451,51.711) 0(3.451,66.711) 0(3.451,79.711) 0(9.578,23.711) 0(9.578,36.711) 0(9.578,51.711) 0(9.578,66.711) 0(9.578,79.711) 0(9.635,93) 0(24,8.356) 0(36,3.238) 0(36,8.356) 0(48,3.238) 0(48,8.356) 0(61,3.238) 0(61,8.356) 0(73,3.238) 0(73,8.356) 0(85,8.356) 0(86.77,26) 0(86.77,53) 0(86.77,61) 0(86.77,74) 0(86.77,85) 0(86.77,96) 0(86.77,107) 0(86.77,118) 0(86.77,129) 0(86.77,140) 0(93.77,26) 0(93.77,53) 0(93.77,74) 0(93.77,85) 0(93.77,96) 0(93.77,107) 0(93.77,118) 0(93.77,129) 0(93.77,140) 0(93.77,153)
  round 3.5 hole 3.5 mask+0: 0(5.08,5.08) 0(5.08,15.24) 0(5.08,96.52) 0(5.08,106.68) 0(5.08,116.84) 0(5.08,127) 0(5.08,137.16) 0(5.08,147.32) 0(5.08,157.48) 0(12.7,96.52) 0(12.7,106.68) 0(12.7,116.84) 0(15.24,5.08) 0(30.48,66.04) 0(30.48,76.2) 0(55.88,60.96) 0(66.04,60.96) 0(73.66,157.48) 0(83.82,157.48) 0(91.44,5.08) 0(91.44,15.24) 0(93.98,157.48)

## Via types
v1: diameter 0.6, hole 0.3, LVDS to CMOS, 70 vias

## Nets (pads, with @x,y where several pads share a name; then routed paths per layer and width w, separated by ;. In a path a pad name is that pad's centre, name@x,y a point inside that pad or via, vN(x,y) a via of type N, cw(c..) or ccw(c..) an arc to the next point about the centre after c; other vN are vias at no path point)
ADC: C14.2 D2.T17 | length 13.1
  LVDS w0.508: D2.T17@42.52,124.84 v1(43.155,124.205)
  CMOS w0.254: v1(43.155,124.205) 43.815,124.865 47.066,124.865 47.625,124.307 47.625,121.114 C14.2@50.477,118.261
CLK_IN: D2.G15 X12.2 | length 72.8
  LVDS w0.508: v1(39.345,136.905) D2.G15@39.98,136.27
  CMOS w0.508: X12.2@17.297,89.2 17.297,134.289 24.384,141.375 34.874,141.375 v1(39.345,136.905)
CMD_N: C26.2 D2.M17 | length 10
  LVDS w0.508: v1(41.885,130.555) D2.M17@42.52,129.92
  CMOS w0.127: v1(41.885,130.555) 42.393,131.063 49.639,131.063 C26.2@50.477,130.225
CMD_P: C11.2 D2.L17 | length 11.5
  LVDS w0.508: v1(41.885,131.825) D2.L17@42.52,131.19
  CMOS w0.127: v1(41.885,131.825) 42.393,132.333 50.985,132.333 C11.2@51.9,133.247
CMD_P_INV: C12.2 D2.L16 | length 7.2
  LVDS w0.508: v1(40.615,131.825) D2.L16@41.25,131.19
  CMOS w0.127: v1(40.615,131.825) 41.377,132.587 43.612,132.587 44.272,133.247 C12.2@46.362,133.247
COL_AMP: C25.2 D2.R17 | length 9.4
  LVDS w0.508: D2.R17@42.52,126.11 v1(43.155,125.475)
  CMOS w0.254: v1(43.155,125.475) 43.79,126.11 48.242,126.11 C25.2@50.452,123.9
COL_LOAD: C24.2 D2.R16 | length 13.4
  LVDS w0.508: D2.R16@41.25,126.11 v1(41.885,125.475)
  CMOS w0.127: C24.2@39.454,114.782 38.43,115.805 38.43,118.388 41.377,121.335 41.377,124.967 v1(41.885,125.475)
COL_PC: C28.2 D2.T18 | length 13.3
  LVDS w0.508: D2.T18@43.79,124.84 v1(44.425,124.205)
  CMOS w0.254: v1(44.425,124.205) 46.431,124.205 47.219,123.418 47.219,118.701 C28.2@50.477,115.442